# Altium PCB PCB1.PcbDoc
Units mm, origin at the board's own origin, x right, y up, seen from the top; angles counter-clockwise.
Board outline 60 x 45 mm, 2 copper layers (Top Layer, Bottom Layer); 20 components, 12 nets, 83 pads, 8 vias.
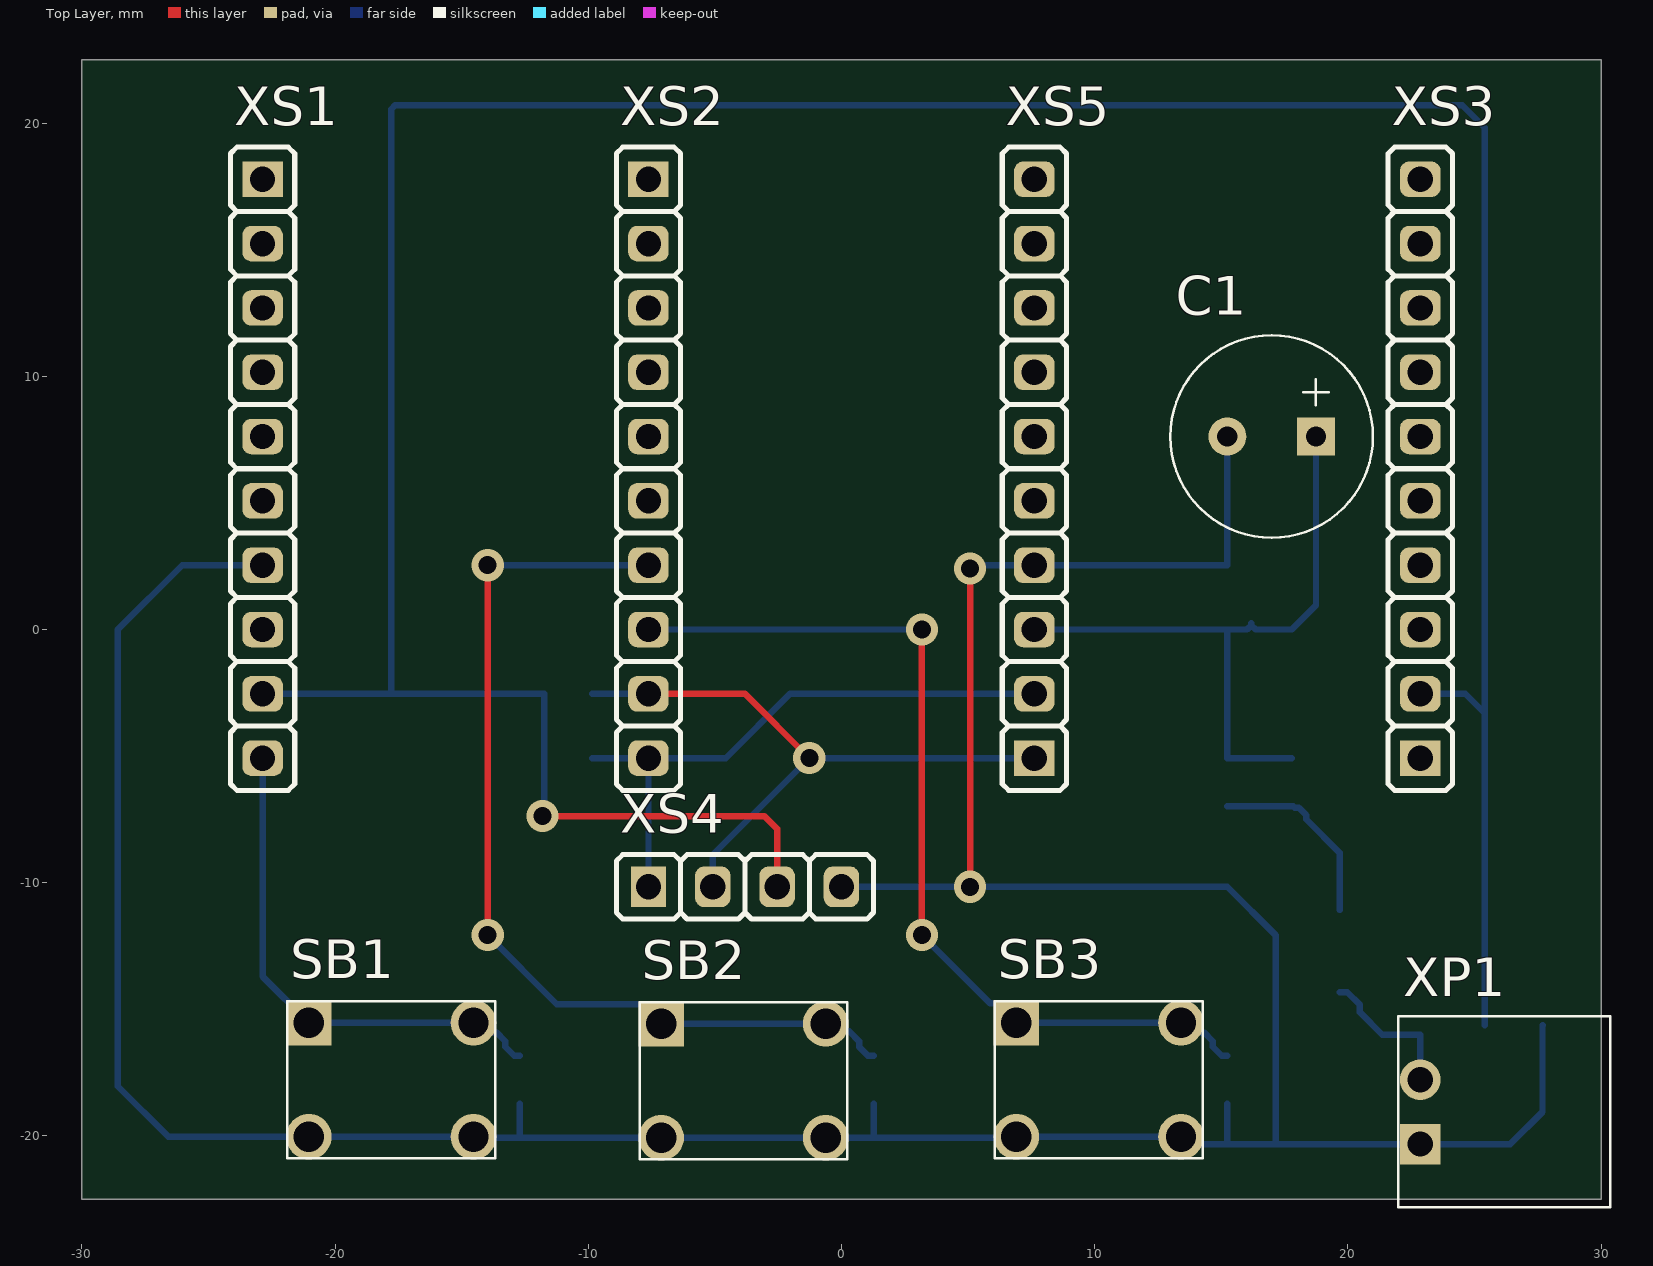
[diagram p0: Top Layer view]
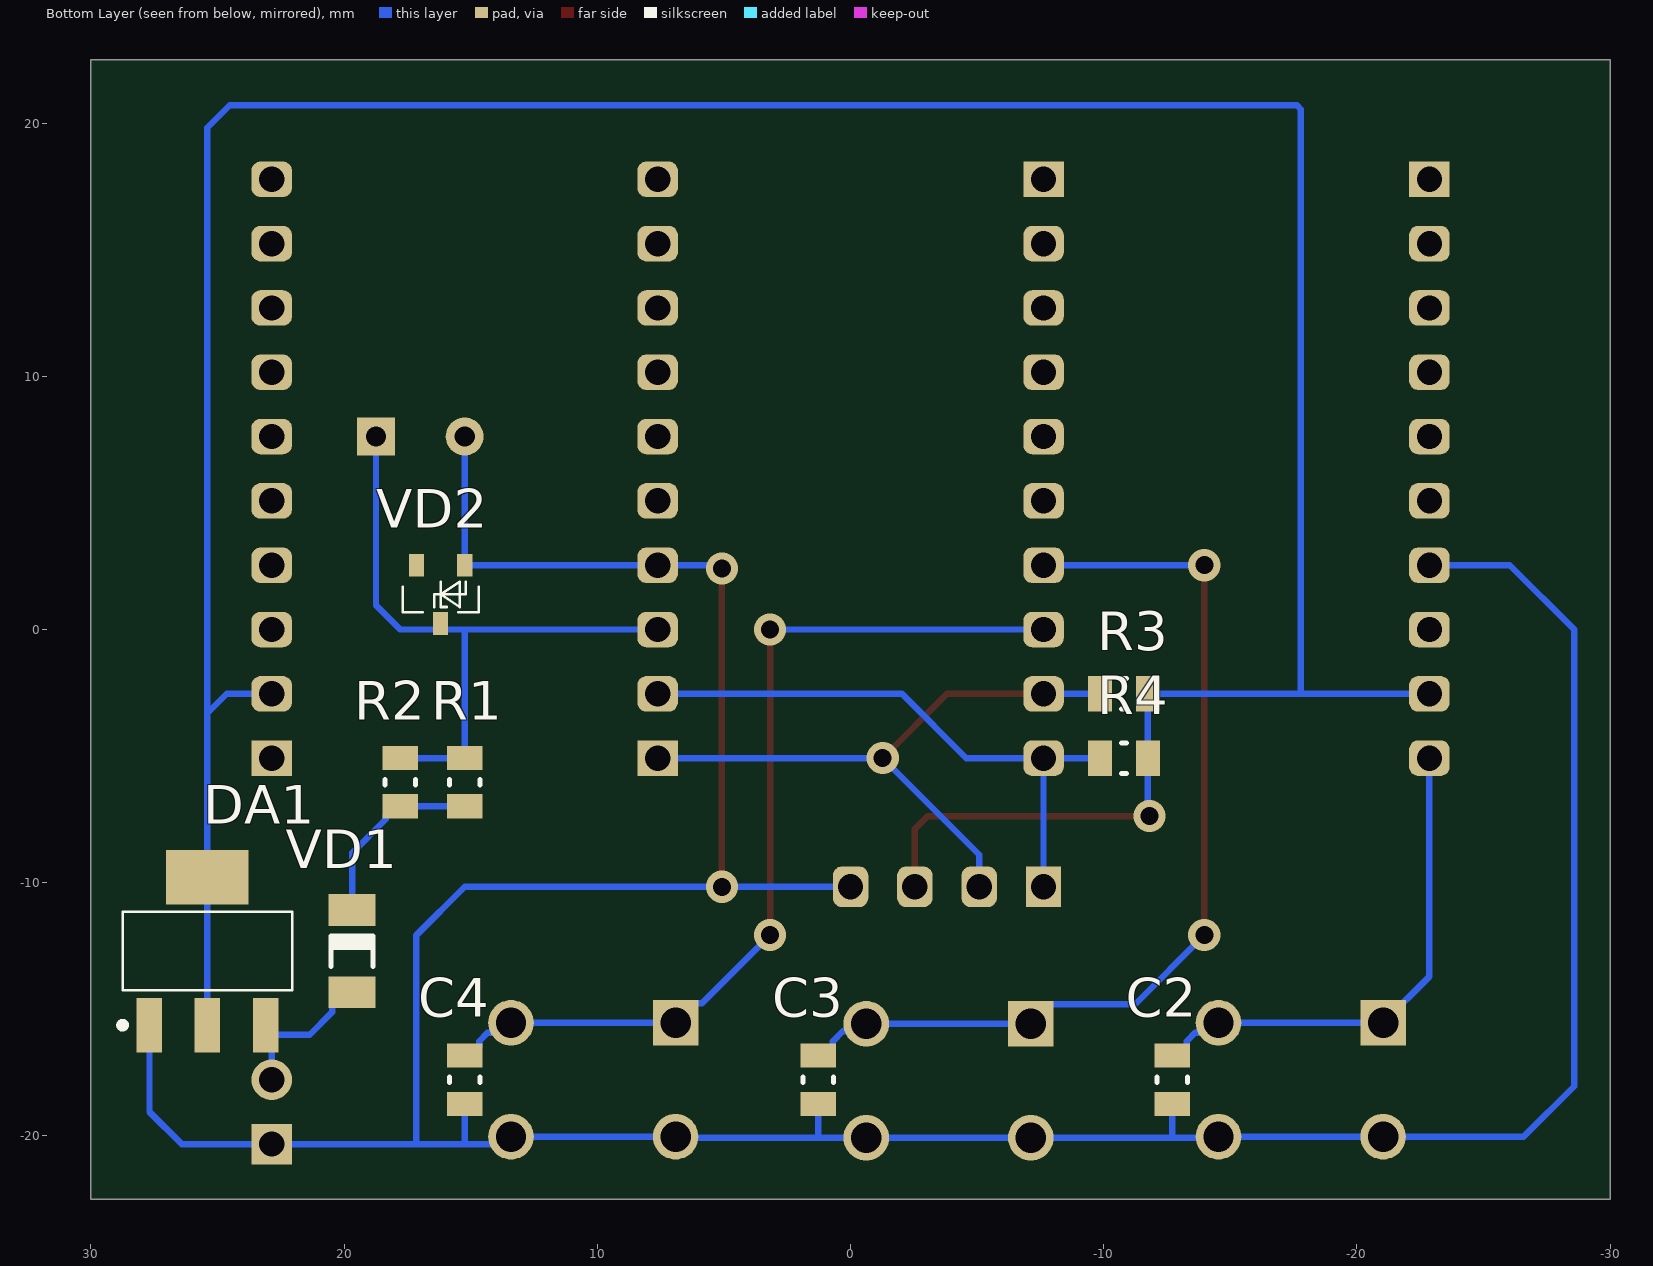
[diagram p1: Bottom Layer view, seen from below]

## Layer stack, top to bottom
Top Solder: solder mask 0.0102, Solder Resist, Dk 3.5
Top Layer: signal copper 0.0356
Dielectric 1: dielectric 0.32, FR-4, Dk 4.8
Bottom Layer: signal copper 0.0356
Bottom Solder: solder mask 0.0102, Solder Resist, Dk 3.5

## Board outline
-30,-22.5 -30,22.5 30,22.5 30,-22.5

## Design rules (kind name [scope] priority, off if disabled: settings)
Clearance [All] p1: gap=0.254 ignorepadtopadclearanceinfootprint=FALSE
PolygonConnect [All] p1: connectstyle=Relief reliefconductorwidth=0.254 reliefentries=4 polygonreliefangle="90 Angle" airgapwidth=0.254
RoutingVias [All] p1: holewidth=0.711 width=1.27 viastyle="Through Hole" minholewidth=0.711 minwidth=1.27 maxholewidth=0.711 maxwidth=1.27
SolderMaskExpansion [All] p1: expansion=0.102 istentingtop=FALSE
SupplyNets "Schematic Supply Nets_2" [InNet('GND')] p1: voltage=0.000
SupplyNets "Schematic Supply Nets_1" [InNet('3V3')] p2: voltage=0.000
SupplyNets "Schematic Supply Nets" [InNet('5V')] p3: voltage=0.000
Width [All] p1: maxlimit=0.254 minlimit=0.254 preferedwidth=0.254
30 further rules are at their usual default settings.

## Components (designator, comment, footprint, x,y, rotation, side; value= is the part's Value field where it differs from the comment)
C1 "20F 3.8V" LIC0813 16.99,7.62 r180 top
C2 "0.1uF 50V" "CAP SMD0805" -12.7,-17.78 r270 bottom
C3 "0.1uF 50V" "CAP SMD0805" 1.27,-17.78 r270 bottom
C4 "0.1uF 50V" "CAP SMD0805" 15.24,-17.78 r270 bottom
DA1 "LM1117MP-3.3" SOT223 25.4,-12.7 r90 bottom
R1 "30R 5%" "SMD 0805" 15.24,-6.03 r90 bottom
R2 "30R 5%" "SMD 0805" 17.78,-6.03 r90 bottom
R3 "3k3 5%" "SMD 0805" -10.795,-2.54 r180 bottom
R4 "3k3 5%" "SMD 0805" -10.795,-5.08 r180 bottom
SB1 "KLS7-TS6601-4.3-180" KLS7-TS6601-4.3-180 -17.78,-17.78 r0 top
SB2 "KLS7-TS6601-4.3-180" KLS7-TS6601-4.3-180 -3.87,-17.82 r0 top
SB3 "KLS7-TS6601-4.3-180" KLS7-TS6601-4.3-180 10.16,-17.78 r0 top
VD1 "LL4148" MINIMELF 19.685,-12.7 r270 bottom
VD2 "BZX84C3V9" SOT23_1A3C 16.19,1.39 r270 bottom
XP1 "CWF-02R-B" CWF-02R-B 22.86,-20.32 r90 top
XS1 "PBS-10" PBS-10 -22.86,17.78 r270 top
XS2 "PBS-10" PBS-10 -7.62,17.78 r270 top
XS3 "PBS-10" PBS-10 22.86,-5.08 r90 top
XS4 "PBS-04" PBS-04 -7.62,-10.16 r0 top
XS5 "PBS-10" PBS-10 7.62,-5.08 r90 top

## Footprints (in the part's own frame and the unit in brackets; to place one, negate y for a bottom-side part, rotate by r counter-clockwise, add the part's x,y. Pads: shape width x height; smd on the part's side, far side on the other; paste and mask are expansions set on the pad)
"CAP SMD0805" [mm]
  rect 0.95x1.4 smd: 1(-0.95,0) 2(0.95,0)
  silkscreen extent -0.1,-0.6 0.1,0.6, body extent -1,-0.62 1,0.63, height 0.85
CWF-02R-B [mm]
  rect 1.6x1.6 hole 1: 1(0,0)
  round 1.6 hole 1: 2(2.54,0)
  silkscreen extent -2.5,-7.5 5.04,0.87, body extent -2.5,-7.5 5.04,0.32, height 5.75
KLS7-TS6601-4.3-180 [mm] "Tact button"
  rect 1.8x1.8 hole 1.2: 1(-3.25,2.25)
  round 1.8 hole 1.2: 2(3.25,2.25) 3(-3.25,-2.25) 4(3.25,-2.25)
  silkscreen extent -4.1,-3.1 4.1,3.1, body extent -3.85,-3 3.85,3, height 4.3
LIC0813 [mm]
  rect 1.5x1.5 hole 0.8: 1(-1.75,0)
  round 1.5 hole 0.8: 2(1.75,0)
  silkscreen extent -4,-4 4,4, body extent -4,-4 4,4, height 13
MINIMELF [mm]
  rect 1.25x1.85 smd: A(1.625,0) C(-1.625,0)
  silkscreen extent -0.6,-0.83 0.6,0.82, body extent -1.85,-0.85 1.85,0.85, height 1.7
PBS-04 [mm]
  rect 1.4x1.6 hole 1: 1(0,0)
  rrect50% 1.4x1.6 hole 1: 2(2.54,0) 3(5.08,0) 4(7.62,0)
  silkscreen extent -1.27,-1.27 8.89,1.27, body extent -1.27,-1.27 8.89,1.23, height 8
PBS-10 [mm]
  rect 1.4x1.6 hole 1: 1(0,0)
  rrect50% 1.4x1.6 hole 1: 2(2.54,0) 3(5.08,0) 4(7.62,0) 5(10.16,0) 6(12.7,0) 7(15.24,0) 8(17.78,0) 9(20.32,0) 10(22.86,0)
  silkscreen extent -1.27,-1.27 24.13,1.27, body extent -1.27,-1.27 24.13,1.23, height 8
"SMD 0805" [mm]
  rect 0.95x1.4 smd: 1(-0.95,0) 2(0.95,0)
  silkscreen extent -0.1,-0.6 0.1,0.6, body extent -1,-0.63 1,0.62, height 0.5
SOT23_1A3C [mm]
  rect 0.9x0.6 smd: 0(-1.15,-0.95) A(-1.15,0.95) C(1.15,0)
  silkscreen extent -0.5,-1.5 0.7,1.5, body extent -1.3,-1.5 1.3,1.5, height 1.1
SOT223 [mm] "SOT223"
  rect 2.15x1 smd: 1(-2.925,2.3) 2(-2.925,0) 3(-2.925,-2.3)
  rect 2.15x3.25 smd: 2(2.925,0)
  silkscreen extent -3.05,-3.35 1.55,3.48, body extent -3.45,-3.25 3.45,3.25, height 1.7

## Part data
C1: library part "LIC 0813 206", "Ионистор 20F 3.8V 0813", Class=Ионистор, Part Number="LIC 0813 206", Код=15
C2 C3 C4: library part "Cap 0805 0.1uF 50V", "Конденсатор керамический SMD 0805 0.1uF 50V ±20%", Class="Конденсатор неполярный SMD", Part Number="Cap 0805 0.1uF 50V", Код=42
DA1: "LDO стабилизатор", Class=Микросхема, Part Number=LM1117MP-3.3, Код=137
R1 R2: library part "Res 0805 30R 5%", "Резистор SMD 0805 30R 5%", Class="Резистор SMD", Part Number="Res 0805 30R 5%", Код=1192
R3 R4: library part "Res 0805 3k3 5%", "Резистор SMD 0805 3k3 5%", Class="Резистор SMD", Part Number="Res 0805 3k3 5%", Код=1241
SB1 SB2 SB3: "Кнопка тактовая KLS7-TS6601 6х6х4,3мм", Class="Кнопка тактовая", Part Number=KLS7-TS6601-4.3-180, Код=2
VD1: "Диод LL4148", Class=Диоды, Part Number=LL4148, Код=12
VD2: "Стабилитрон BZX84C3V9 SOT23", Class=Стабилитроны, Part Number=BZX84C3V9, Код=6
XP1: "Разъём CWF-02R-B вилка угловая 2,50мм тип B", Class=Разъём, Part Number=CWF-02R-B, Код=346, Поле9="вилка угловая 2,50мм тип B"
XS1 XS2 XS3 XS5: "Разъём PBS-10 гнездо однорядное 2,54мм", Class=Разъём, Part Number=PBS-10, Код=126, Поле9="гнездо однорядное 2,54мм"
XS4: "Разъём PBS-04 гнездо однорядное 2,54мм", Class=Разъём, Part Number=PBS-04, Код=120, Поле9="гнездо однорядное 2,54мм"

## Via types
v1: diameter 1.27, hole 0.711, Top Layer to Bottom Layer, 8 vias

## Nets (pads, with @x,y where several pads share a name; then routed paths per layer and width w, separated by ;. In a path a pad name is that pad's centre, name@x,y a point inside that pad or via, vN(x,y) a via of type N, cw(c..) or ccw(c..) an arc to the next point about the centre after c; other vN are vias at no path point)
3V3: DA1.2 R3.2 R4.2 XS1.9 XS3.2 XS4.3 | length 132.7
  Top Layer w0.254: v1(-11.811,-7.366) -3.048,-7.366 -2.54,-7.874 XS4.3
  Bottom Layer w0.254: XS1.9 -17.78,-2.54 ; v1(-11.811,-7.366) -11.745,-7.3 R4.2 R3.2 -17.78,-2.54 ; XS3.2 24.638,-2.54 25.4,-3.302 ; DA1.2@25.4,-15.625 25.4,-9.775 25.4,-3.302 ; -17.78,-2.54 -17.78,20.552 -17.631,20.701 24.511,20.701 25.4,19.812 25.4,-3.302
5V: DA1.3 VD1.A XP1.2 | length 5.8
  Bottom Layer w0.254: VD1.A 19.977,-14.325 20.475,-14.823 20.475,-15.115 21.362,-16.002 22.86,-16.002 XP1.2
BUT1: C2.1 SB1.1 SB1.2 XS1.10 | length 20.2
  Bottom Layer w0.254: XS1.10 -22.86,-13.7 SB1.1 SB1.2 -14.112,-15.53 -13.725,-15.917 -13.613,-15.917 -13.273,-16.257 -13.273,-16.482 -12.925,-16.83 C2.1
BUT2: C3.1 SB2.1 SB2.2 XS2.7 | length 38.3
  Top Layer w0.254: v1(-13.97,-12.065) v1(-13.97,2.54)
  Bottom Layer w0.254: v1(-13.97,-12.065) -11.238,-14.797 -7.893,-14.797 SB2.1 SB2.2 -0.324,-15.866 0.306,-15.866 0.697,-16.257 0.697,-16.482 1.045,-16.83 C3.1 ; v1(-13.97,2.54) XS2.7
BUT3: C4.1 SB3.1 SB3.2 XS2.8 | length 37
  Top Layer w0.254: v1(3.175,-12.065) v1(3.175,0)
  Bottom Layer w0.254: XS2.8 v1(3.175,0) ; v1(3.175,-12.065) 5.867,-14.757 6.137,-14.757 SB3.1 SB3.2 13.828,-15.53 14.215,-15.917 14.327,-15.917 14.667,-16.257 14.667,-16.482 15.015,-16.83 C4.1
GND: C1.2 C2.2 C3.2 C4.2 DA1.1 SB1.3 SB1.4 SB2.3 SB2.4 SB3.3 SB3.4 VD2.A XP1.1 XS1.7 XS4.4 XS5.4 | length 144.3
  Top Layer w0.254: v1(5.08,-10.16) v1(5.08,2.413)
  Bottom Layer w0.254: XS1.7 -26.035,2.54 -28.575,0 -28.575,-18.034 -26.579,-20.03 SB1.3 SB1.4 -14.49,-20.07 -12.7,-20.07 ; C2.2 -12.7,-20.07 ; XS4.4 v1(5.08,-10.16) 15.24,-10.16 17.145,-12.065 17.145,-20.32 ; C3.2 1.27,-20.07 ; v1(5.08,2.413) 5.207,2.54 XS5.4 VD2.A C1.2 ; C4.2 15.24,-20.32 ; DA1.1 27.686,-15.639 27.686,-19.05 26.416,-20.32 XP1.1 17.145,-20.32 ; -12.7,-20.07 SB2.3 SB2.4 1.27,-20.07 ; 1.27,-20.07 6.87,-20.07 SB3.3 SB3.4 13.7,-20.32 15.24,-20.32 ; 15.24,-20.32 17.145,-20.32
NetR1_1: R1.1 R2.1 VD1.C | length 7.6
  Bottom Layer w0.254: R1.1 R2.1 17.842,-6.98 17.904,-7.042 18.067,-7.042 18.353,-7.328 18.353,-7.491 19.685,-8.823 VD1.C
PD3: XS2.1
PD4: XS1.1
SCL: R3.1 XS2.9 XS4.2 XS5.1 | length 25.2
  Top Layer w0.254: XS2.9 -3.81,-2.54 v1(-1.27,-5.08)
  Bottom Layer w0.254: R3.1 XS2.9 ; XS4.2 -5.08,-8.89 v1(-1.27,-5.08) XS5.1
SDA: R4.1 XS2.10 XS4.1 XS5.2 | length 23.6
  Bottom Layer w0.254: R4.1 XS2.10 ; XS4.1 XS2.10 ; XS5.2 -2.032,-2.54 -4.572,-5.08 XS2.10
VBAT: C1.1 R1.2 R2.2 VD2.C XS5.3 | length 26
  Bottom Layer w0.254: XS5.3 15.24,0 ; VD2.C VD2.C@16.19,0.173 ; R2.2 R1.2 15.24,0 ; C1.1 18.74,0.96 17.78,0 16.363,0 VD2.C@16.19,0.173 ; 15.24,0 16.017,0 VD2.C@16.19,0.173
pads on no net: VD2.0 XS1.2 XS1.3 XS1.4 XS1.5 XS1.6 XS1.8 XS2.2 XS2.3 XS2.4 XS2.5 XS2.6 XS3.1 XS3.3 XS3.4 XS3.5 XS3.6 XS3.7 XS3.8 XS3.9 XS3.10 XS5.5 XS5.6 XS5.7 XS5.8 XS5.9 XS5.10

## Silkscreen, mask and mechanical layers (free items; w line width, h text height)
Mechanical 1:
  lines w0.254: -30,-22.5 -29,-22.5 30,-22.5 30,22.5 -30,22.5 -30,-22.5